# Altium PCB PCB.PcbDoc
Units mm, origin at the board's own origin, x right, y up, seen from the top; angles counter-clockwise.
Board outline 88.52 x 90.58 mm, 2 copper layers (Top Layer, Bottom Layer); 142 components, 58 nets, 379 pads, 215 vias.
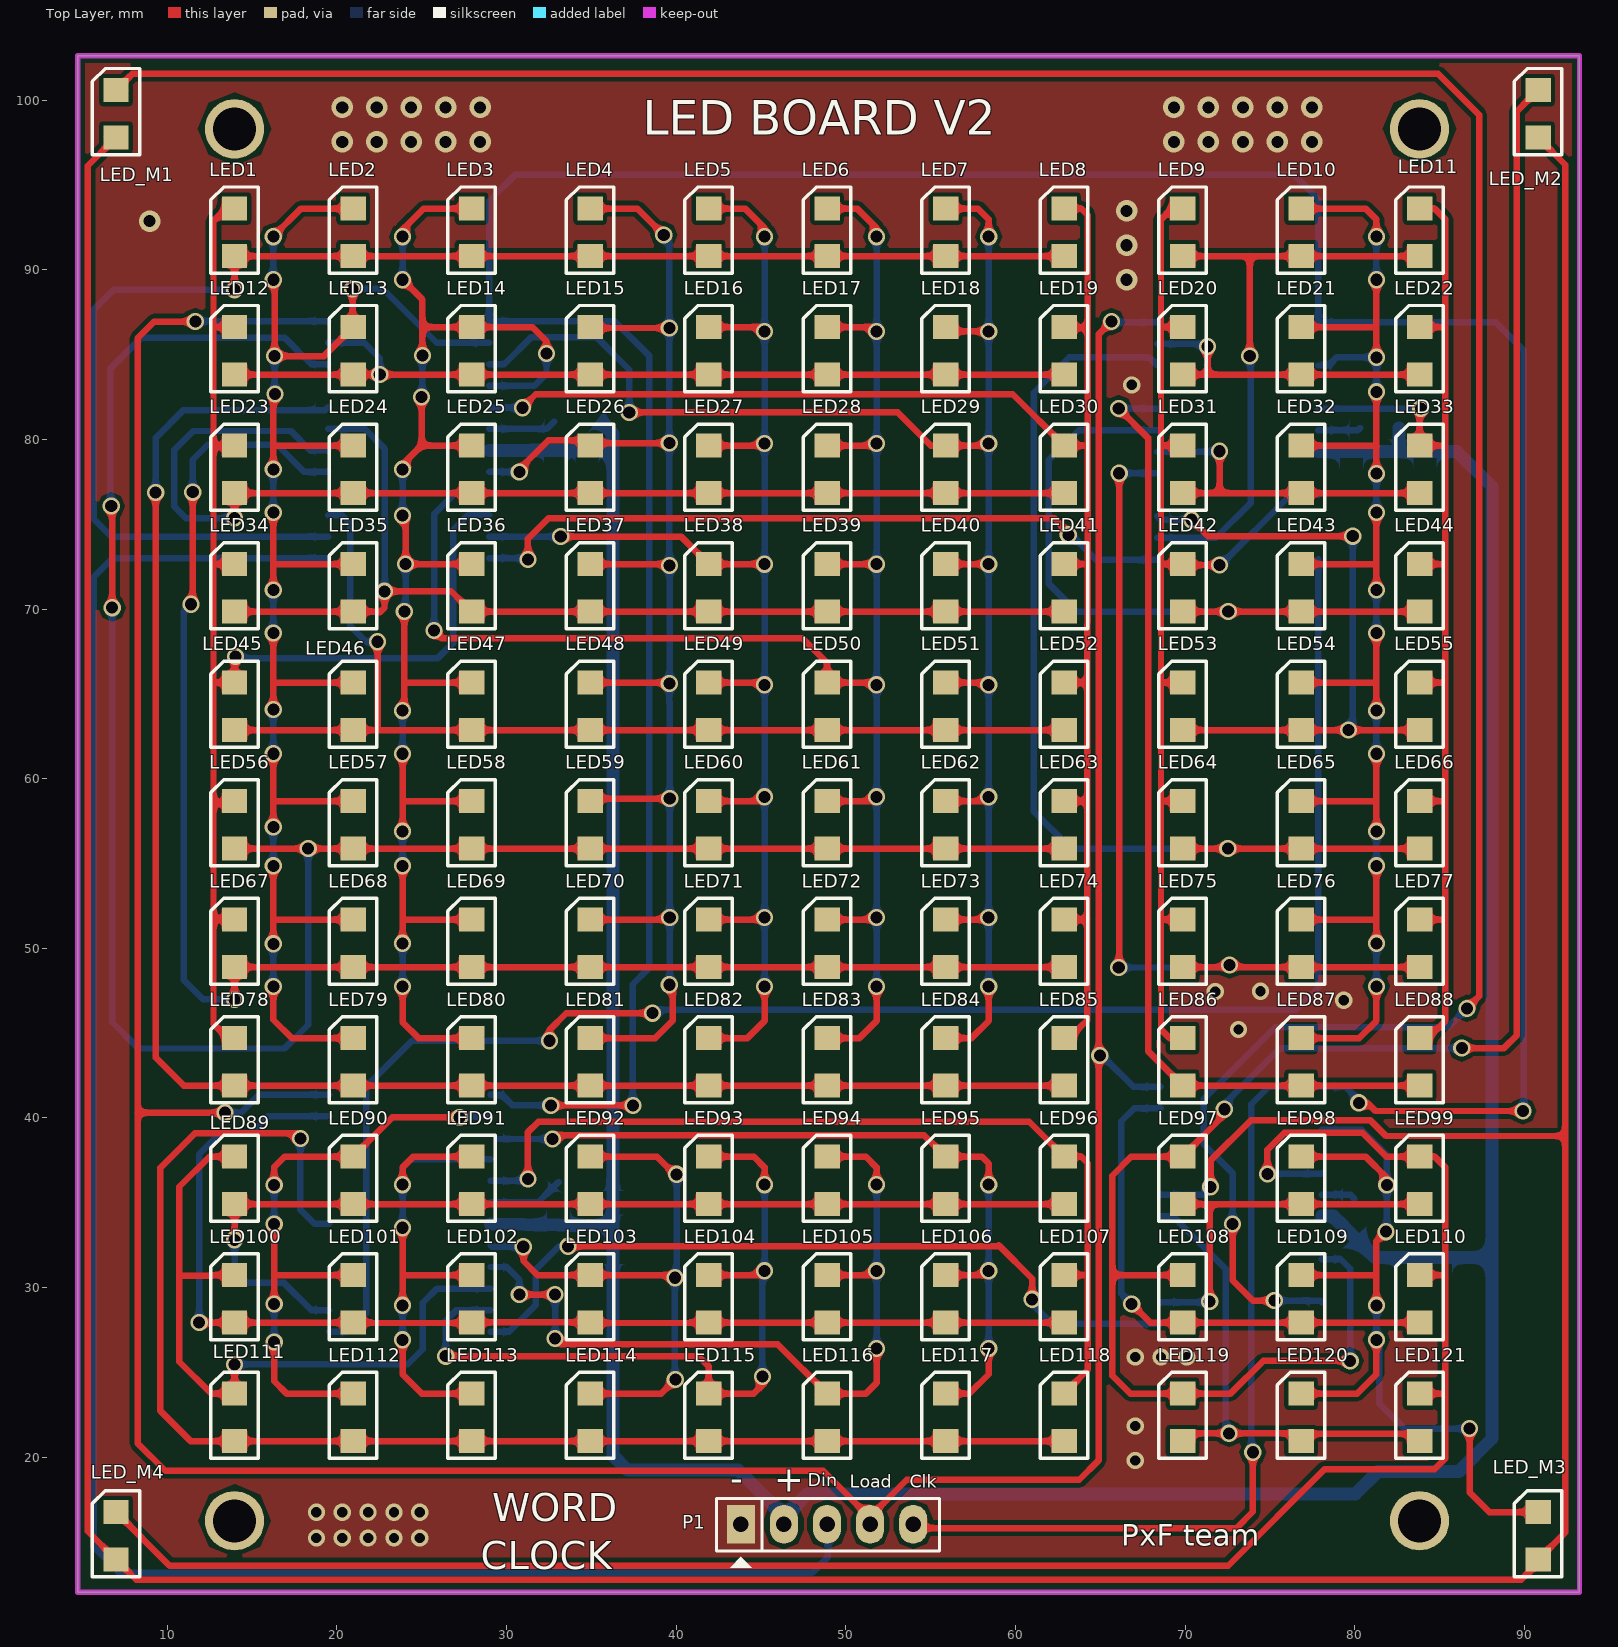
[diagram p0: Top Layer view]
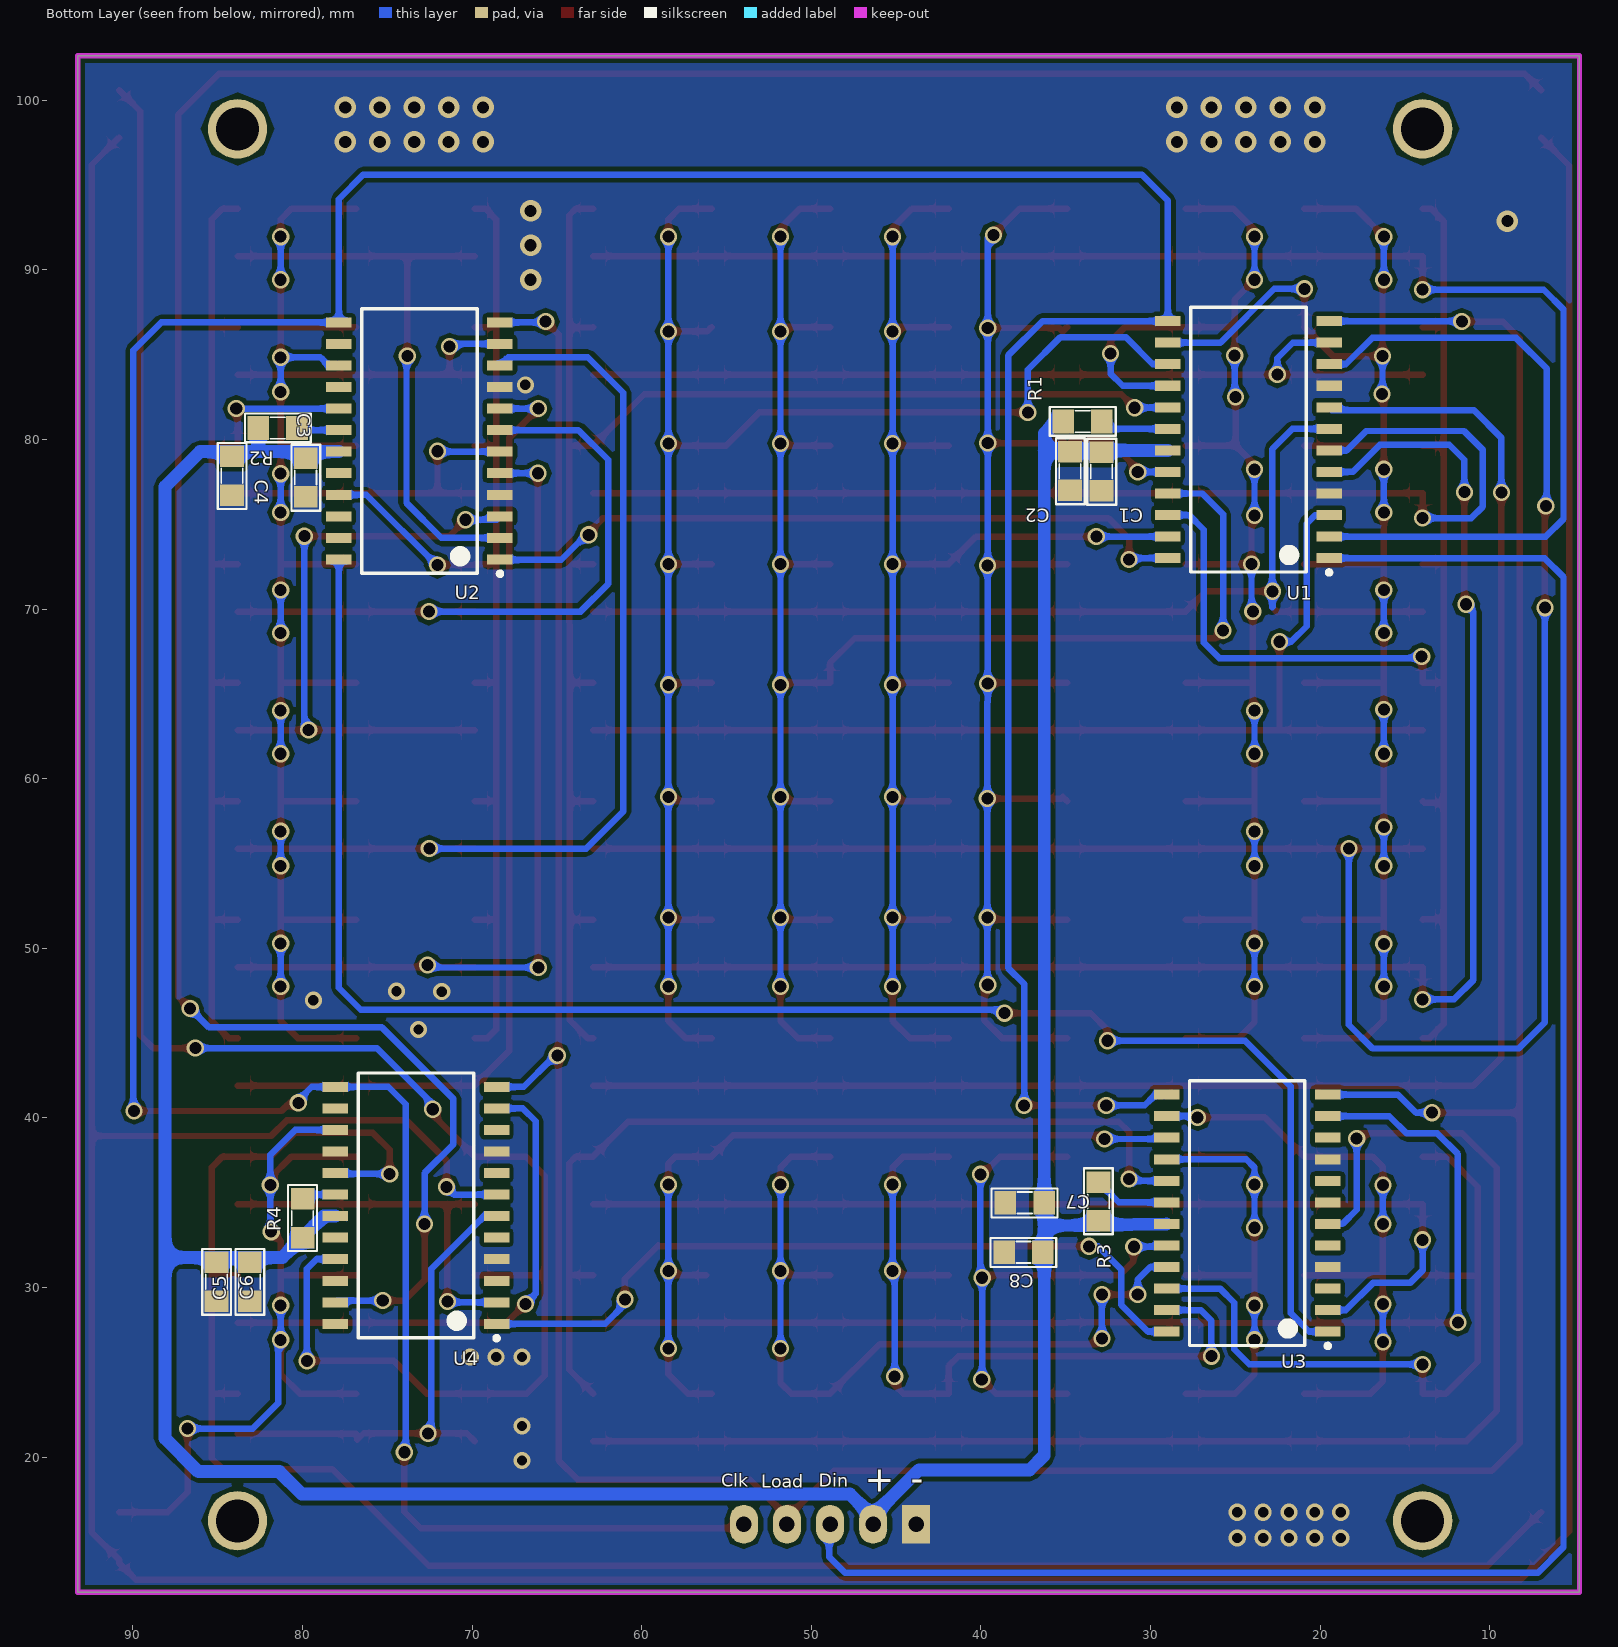
[diagram p1: Bottom Layer view, seen from below]
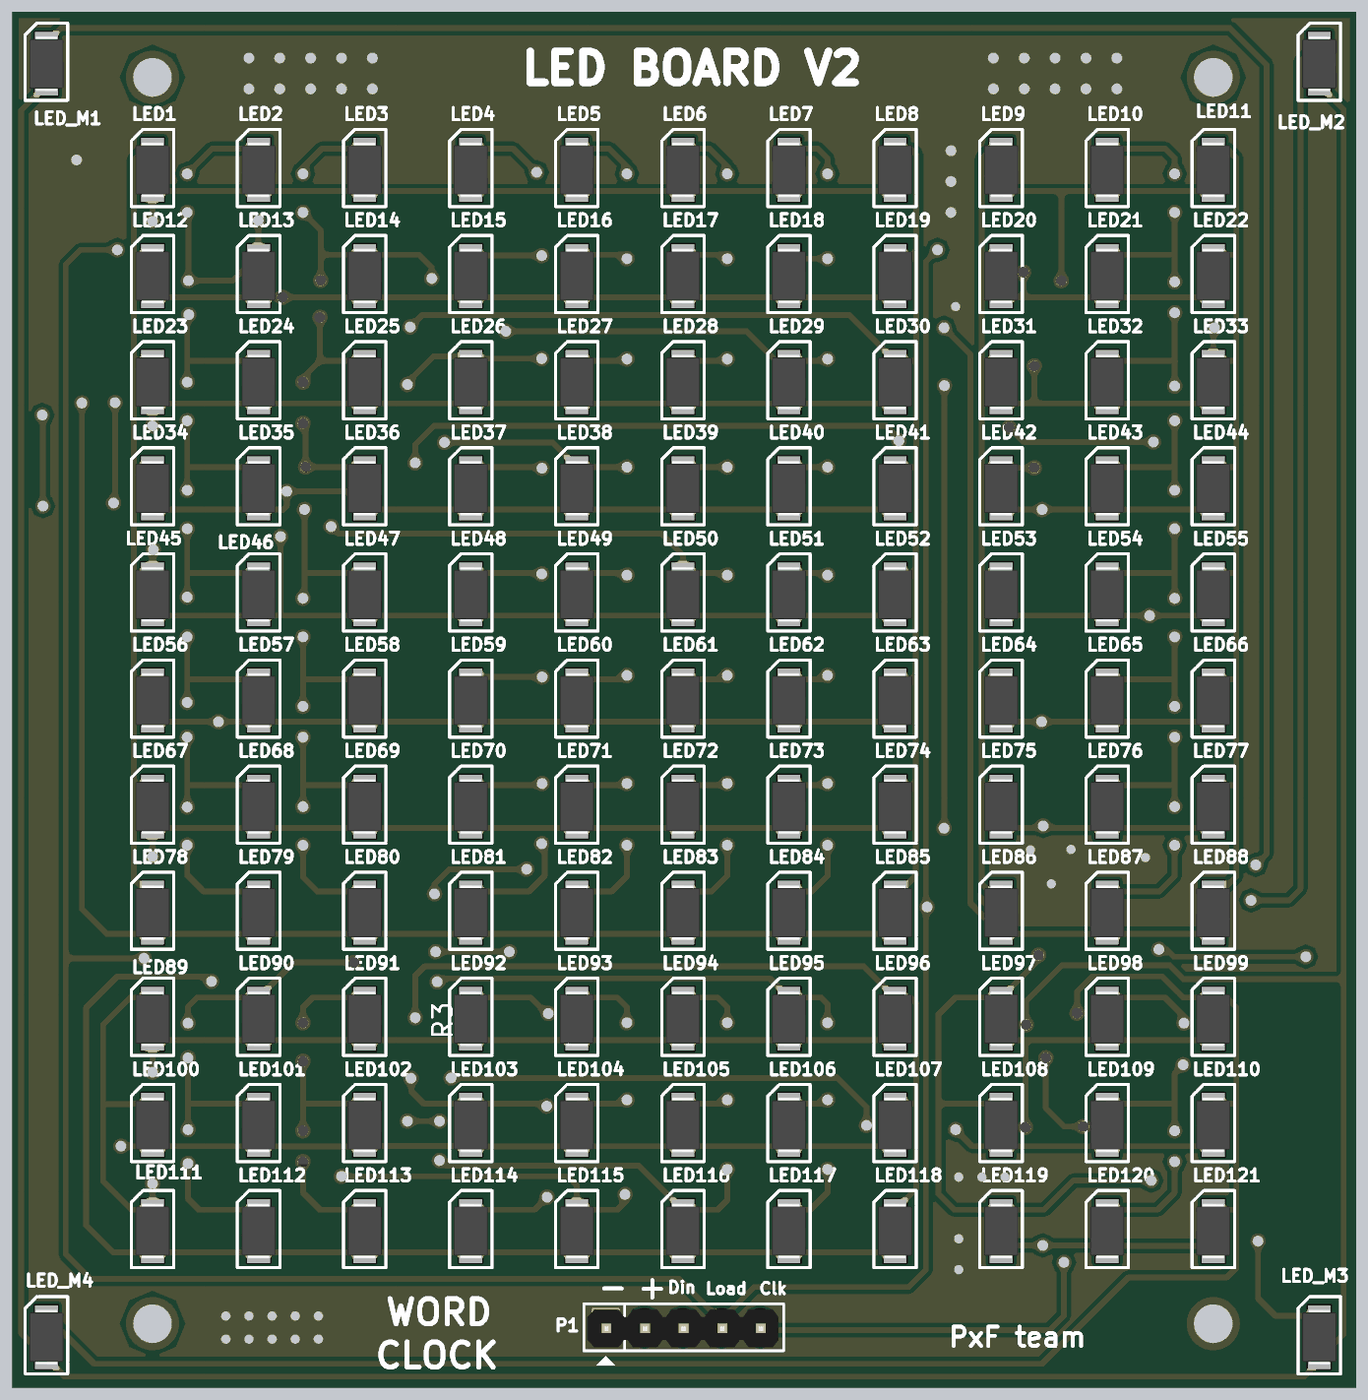
[diagram p2: 3D render of the assembled board from above, using the file's embedded part models]
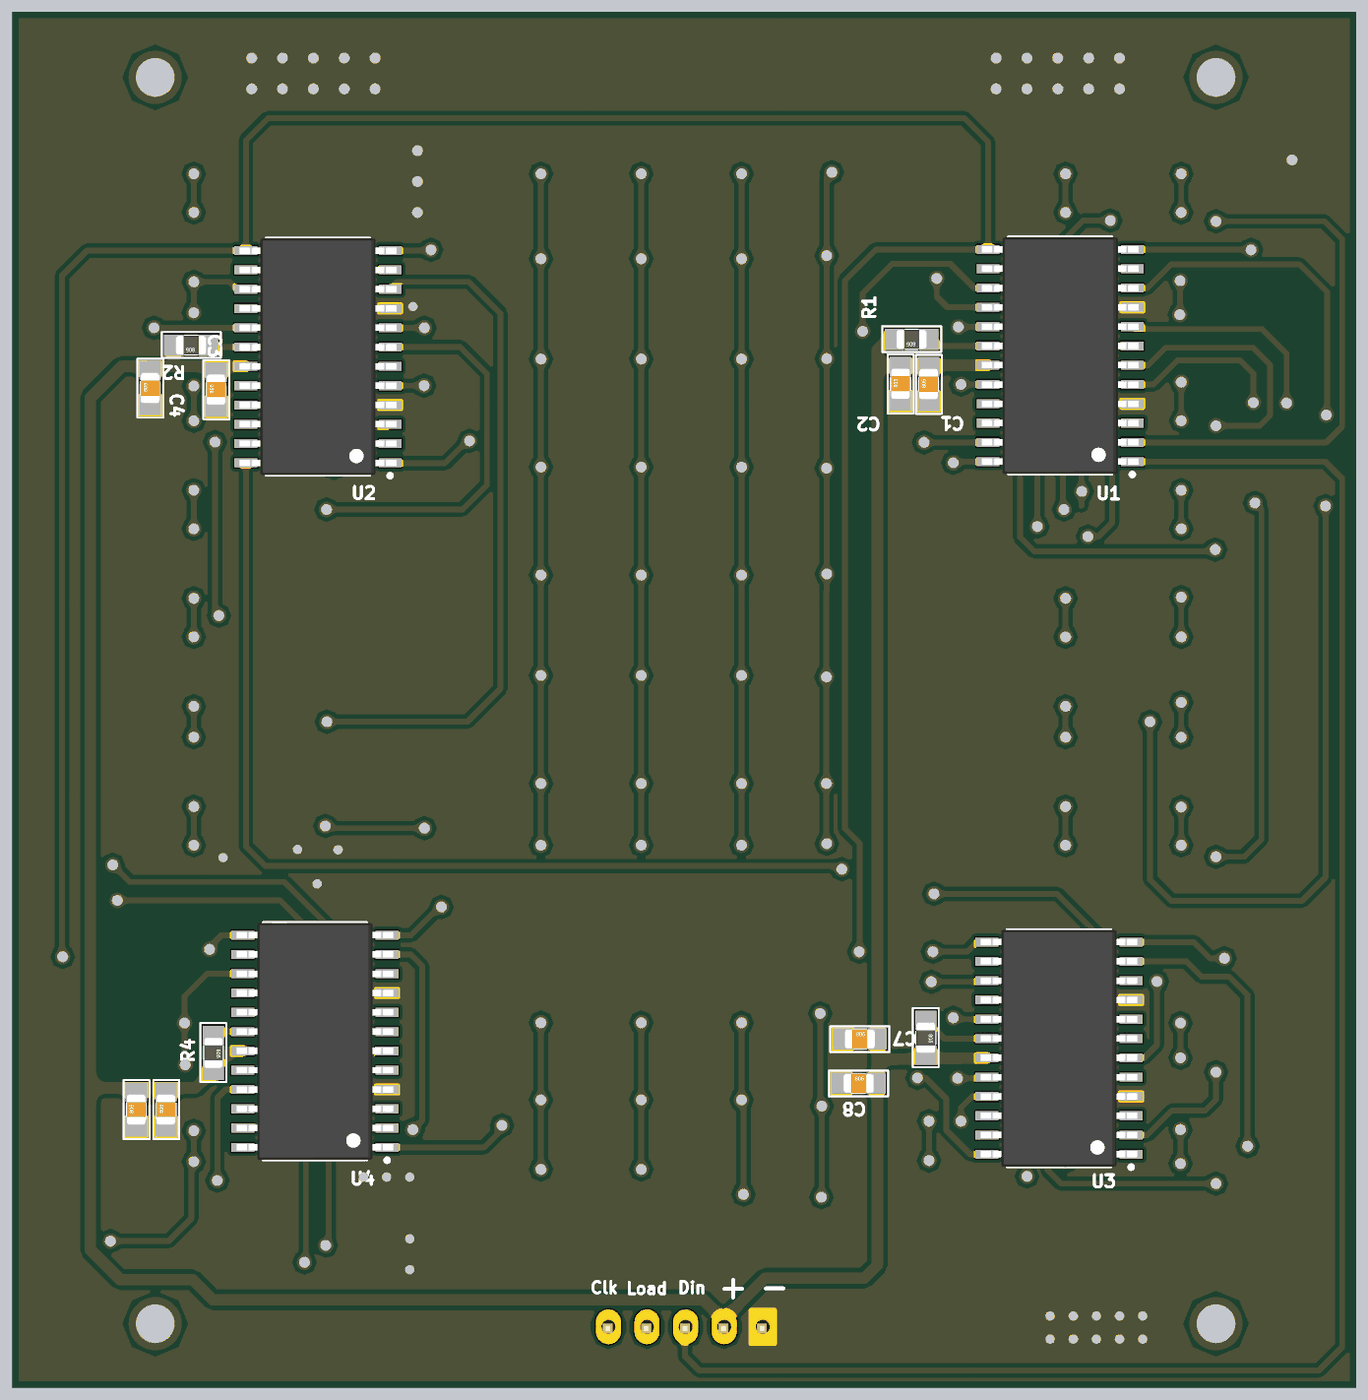
[diagram p3: 3D render of the assembled board from below, using the file's embedded part models]

## Layer stack, top to bottom
Top Solder: solder mask 0.0102, Solder Resist, Dk 3.5
Top Layer: signal copper 0.0356
Dielectric 1: dielectric 0.32, FR-4, Dk 4.8
Bottom Layer: signal copper 0.0356
Bottom Solder: solder mask 0.0102, Solder Resist, Dk 3.5

## Board outline
4.724,12.04 4.724,102.616 93.243,102.616 93.243,12.04

## Design rules (kind name [scope] priority, off if disabled: settings)
Clearance [All] p1: gap=0.254 ignorepadtopadclearanceinfootprint=FALSE
PlaneConnect [All] p1: planeconnectstyle=Relief reliefexpansion=0.508 reliefentries=4 reliefconductorwidth=0.381 reliefairgap=0.203
PolygonConnect [All] p1: connectstyle=Direct reliefconductorwidth=0.305 reliefentries=4 polygonreliefangle="90 Angle" airgapwidth=0.203
RoutingVias [All] p1: holewidth=1.27 width=2.54 viastyle="Through Hole" minholewidth=0.61 minwidth=1.016 maxholewidth=0.711 maxwidth=1.016
SolderMaskExpansion [All] p1: expansion=0.102
Width [All] p1: maxlimit=1.27 minlimit=0.203 preferedwidth=0.305 minimp=50.000000 maximp=50.000000 favimp=50.000000
29 further rules are at their usual default settings.

## Components (designator, comment, footprint, x,y, rotation, side; value= is the part's Value field where it differs from the comment)
C1 "Cap Non-Pol SMD" CAP-SM-0805 32.893,76.962 r90 bottom value=100pF
C2 "Cap Non-Pol SMD" CAP-SM-0805 34.747,76.987 r90 bottom value=100pF
C3 "Cap Non-Pol SMD" CAP-SM-0805 79.807,76.606 r90 bottom value=100pF
C4 "Cap Non-Pol SMD" CAP-SM-0805 84.15,76.708 r90 bottom value=100pF
C5 "Cap Non-Pol SMD" CAP-SM-0805 83.109,29.21 r90 bottom value=100pF
C6 "Cap Non-Pol SMD" CAP-SM-0805 85.065,29.21 r90 bottom value=100pF
C7 "Cap Non-Pol SMD" CAP-SM-0805 38.557,35.001 r180 bottom value=100pF
C8 "Cap Non-Pol SMD" CAP-SM-0805 38.633,32.08 r180 bottom value=100pF
LED1 "KA-3528EC" DIOM3020X13N 13.97,92.205 r90 top
LED2 "KA-3528EC" DIOM3020X13N 20.955,92.205 r90 top
LED3 "KA-3528EC" DIOM3020X13N 27.94,92.205 r90 top
LED4 "KA-3528EC" DIOM3020X13N 34.925,92.205 r90 top
LED5 "KA-3528EC" DIOM3020X13N 41.91,92.205 r90 top
LED6 "KA-3528EC" DIOM3020X13N 48.895,92.205 r90 top
LED7 "KA-3528EC" DIOM3020X13N 55.88,92.205 r90 top
LED8 "KA-3528EC" DIOM3020X13N 62.865,92.205 r90 top
LED9 "KA-3528EC" DIOM3020X13N 69.85,92.205 r90 top
LED10 "KA-3528EC" DIOM3020X13N 76.835,92.205 r90 top
LED11 "KA-3528EC" DIOM3020X13N 83.82,92.205 r90 top
LED12 "KA-3528EC" DIOM3020X13N 13.97,85.22 r90 top
LED13 "KA-3528EC" DIOM3020X13N 20.955,85.22 r90 top
LED14 "KA-3528EC" DIOM3020X13N 27.94,85.22 r90 top
LED15 "KA-3528EC" DIOM3020X13N 34.925,85.22 r90 top
LED16 "KA-3528EC" DIOM3020X13N 41.91,85.22 r90 top
LED17 "KA-3528EC" DIOM3020X13N 48.895,85.22 r90 top
LED18 "KA-3528EC" DIOM3020X13N 55.88,85.22 r90 top
LED19 "KA-3528EC" DIOM3020X13N 62.865,85.22 r90 top
LED20 "KA-3528EC" DIOM3020X13N 69.85,85.22 r90 top
LED21 "KA-3528EC" DIOM3020X13N 76.835,85.22 r90 top
LED22 "KA-3528EC" DIOM3020X13N 83.82,85.22 r90 top
LED23 "KA-3528EC" DIOM3020X13N 13.97,78.235 r90 top
LED24 "KA-3528EC" DIOM3020X13N 20.955,78.235 r90 top
LED25 "KA-3528EC" DIOM3020X13N 27.94,78.235 r90 top
LED26 "KA-3528EC" DIOM3020X13N 34.925,78.235 r90 top
LED27 "KA-3528EC" DIOM3020X13N 41.91,78.235 r90 top
LED28 "KA-3528EC" DIOM3020X13N 48.895,78.235 r90 top
LED29 "KA-3528EC" DIOM3020X13N 55.88,78.235 r90 top
LED30 "KA-3528EC" DIOM3020X13N 62.865,78.235 r90 top
LED31 "KA-3528EC" DIOM3020X13N 69.85,78.235 r90 top
LED32 "KA-3528EC" DIOM3020X13N 76.835,78.235 r90 top
LED33 "KA-3528EC" DIOM3020X13N 83.82,78.235 r90 top
LED34 "KA-3528EC" DIOM3020X13N 13.97,71.25 r90 top
LED35 "KA-3528EC" DIOM3020X13N 20.955,71.25 r90 top
LED36 "KA-3528EC" DIOM3020X13N 27.94,71.25 r90 top
LED37 "KA-3528EC" DIOM3020X13N 34.925,71.25 r90 top
LED38 "KA-3528EC" DIOM3020X13N 41.91,71.25 r90 top
LED39 "KA-3528EC" DIOM3020X13N 48.895,71.25 r90 top
LED40 "KA-3528EC" DIOM3020X13N 55.88,71.25 r90 top
LED41 "KA-3528EC" DIOM3020X13N 62.865,71.25 r90 top
LED42 "KA-3528EC" DIOM3020X13N 69.85,71.25 r90 top
LED43 "KA-3528EC" DIOM3020X13N 76.835,71.25 r90 top
LED44 "KA-3528EC" DIOM3020X13N 83.82,71.25 r90 top
LED45 "KA-3528EC" DIOM3020X13N 13.97,64.265 r90 top
LED46 "KA-3528EC" DIOM3020X13N 20.955,64.265 r90 top
LED47 "KA-3528EC" DIOM3020X13N 27.94,64.265 r90 top
LED48 "KA-3528EC" DIOM3020X13N 34.925,64.265 r90 top
LED49 "KA-3528EC" DIOM3020X13N 41.91,64.265 r90 top
LED50 "KA-3528EC" DIOM3020X13N 48.895,64.265 r90 top
LED51 "KA-3528EC" DIOM3020X13N 55.88,64.265 r90 top
LED52 "KA-3528EC" DIOM3020X13N 62.865,64.265 r90 top
LED53 "KA-3528EC" DIOM3020X13N 69.85,64.265 r90 top
LED54 "KA-3528EC" DIOM3020X13N 76.835,64.265 r90 top
LED55 "KA-3528EC" DIOM3020X13N 83.82,64.265 r90 top
LED56 "KA-3528EC" DIOM3020X13N 13.97,57.28 r90 top
LED57 "KA-3528EC" DIOM3020X13N 20.955,57.28 r90 top
LED58 "KA-3528EC" DIOM3020X13N 27.94,57.28 r90 top
LED59 "KA-3528EC" DIOM3020X13N 34.925,57.28 r90 top
LED60 "KA-3528EC" DIOM3020X13N 41.91,57.28 r90 top
LED61 "KA-3528EC" DIOM3020X13N 48.895,57.28 r90 top
LED62 "KA-3528EC" DIOM3020X13N 55.88,57.28 r90 top
LED63 "KA-3528EC" DIOM3020X13N 62.865,57.28 r90 top
LED64 "KA-3528EC" DIOM3020X13N 69.85,57.28 r90 top
LED65 "KA-3528EC" DIOM3020X13N 76.835,57.28 r90 top
LED66 "KA-3528EC" DIOM3020X13N 83.82,57.28 r90 top
LED67 "KA-3528EC" DIOM3020X13N 13.97,50.295 r90 top
LED68 "KA-3528EC" DIOM3020X13N 20.955,50.295 r90 top
LED69 "KA-3528EC" DIOM3020X13N 27.94,50.295 r90 top
LED70 "KA-3528EC" DIOM3020X13N 34.925,50.295 r90 top
LED71 "KA-3528EC" DIOM3020X13N 41.91,50.295 r90 top
LED72 "KA-3528EC" DIOM3020X13N 48.895,50.295 r90 top
LED73 "KA-3528EC" DIOM3020X13N 55.88,50.295 r90 top
LED74 "KA-3528EC" DIOM3020X13N 62.865,50.295 r90 top
LED75 "KA-3528EC" DIOM3020X13N 69.85,50.295 r90 top
LED76 "KA-3528EC" DIOM3020X13N 76.835,50.295 r90 top
LED77 "KA-3528EC" DIOM3020X13N 83.82,50.295 r90 top
LED78 "KA-3528EC" DIOM3020X13N 13.97,43.31 r90 top
LED79 "KA-3528EC" DIOM3020X13N 20.955,43.31 r90 top
LED80 "KA-3528EC" DIOM3020X13N 27.94,43.31 r90 top
LED81 "KA-3528EC" DIOM3020X13N 34.925,43.31 r90 top
LED82 "KA-3528EC" DIOM3020X13N 41.91,43.31 r90 top
LED83 "KA-3528EC" DIOM3020X13N 48.895,43.31 r90 top
LED84 "KA-3528EC" DIOM3020X13N 55.88,43.31 r90 top
LED85 "KA-3528EC" DIOM3020X13N 62.865,43.31 r90 top
LED86 "KA-3528EC" DIOM3020X13N 69.85,43.31 r90 top
LED87 "KA-3528EC" DIOM3020X13N 76.835,43.31 r90 top
LED88 "KA-3528EC" DIOM3020X13N 83.82,43.31 r90 top
LED89 "KA-3528EC" DIOM3020X13N 13.97,36.325 r90 top
LED90 "KA-3528EC" DIOM3020X13N 20.955,36.325 r90 top
LED91 "KA-3528EC" DIOM3020X13N 27.94,36.325 r90 top
LED92 "KA-3528EC" DIOM3020X13N 34.925,36.325 r90 top
LED93 "KA-3528EC" DIOM3020X13N 41.91,36.325 r90 top
LED94 "KA-3528EC" DIOM3020X13N 48.895,36.325 r90 top
LED95 "KA-3528EC" DIOM3020X13N 55.88,36.325 r90 top
LED96 "KA-3528EC" DIOM3020X13N 62.865,36.325 r90 top
LED97 "KA-3528EC" DIOM3020X13N 69.85,36.325 r90 top
LED98 "KA-3528EC" DIOM3020X13N 76.835,36.325 r90 top
LED99 "KA-3528EC" DIOM3020X13N 83.82,36.325 r90 top
LED100 "KA-3528EC" DIOM3020X13N 13.97,29.34 r90 top
LED101 "KA-3528EC" DIOM3020X13N 20.955,29.34 r90 top
LED102 "KA-3528EC" DIOM3020X13N 27.94,29.34 r90 top
LED103 "KA-3528EC" DIOM3020X13N 34.925,29.34 r90 top
LED104 "KA-3528EC" DIOM3020X13N 41.91,29.34 r90 top
LED105 "KA-3528EC" DIOM3020X13N 48.895,29.34 r90 top
LED106 "KA-3528EC" DIOM3020X13N 55.88,29.34 r90 top
LED107 "KA-3528EC" DIOM3020X13N 62.865,29.34 r90 top
LED108 "KA-3528EC" DIOM3020X13N 69.85,29.34 r90 top
LED109 "KA-3528EC" DIOM3020X13N 76.835,29.34 r90 top
LED110 "KA-3528EC" DIOM3020X13N 83.82,29.34 r90 top
LED111 "KA-3528EC" DIOM3020X13N 13.97,22.355 r90 top
LED112 "KA-3528EC" DIOM3020X13N 20.955,22.355 r90 top
LED113 "KA-3528EC" DIOM3020X13N 27.94,22.355 r90 top
LED114 "KA-3528EC" DIOM3020X13N 34.925,22.355 r90 top
LED115 "KA-3528EC" DIOM3020X13N 41.91,22.355 r90 top
LED116 "KA-3528EC" DIOM3020X13N 48.895,22.355 r90 top
LED117 "KA-3528EC" DIOM3020X13N 55.88,22.355 r90 top
LED118 "KA-3528EC" DIOM3020X13N 62.865,22.355 r90 top
LED119 "KA-3528EC" DIOM3020X13N 69.85,22.355 r90 top
LED120 "KA-3528EC" DIOM3020X13N 76.835,22.355 r90 top
LED121 "KA-3528EC" DIOM3020X13N 83.82,22.355 r90 top
LED_M1 "KA-3528EC" DIOM3020X13N 6.985,99.19 r90 top
LED_M2 "KA-3528EC" DIOM3020X13N 90.805,99.19 r90 top
LED_M3 "KA-3528EC" DIOM3020X13N 90.805,15.37 r90 top
LED_M4 "KA-3528EC" DIOM3020X13N 6.985,15.37 r90 top
P1 "Header 5" JP5 43.815,16.053 r0 top
R1 "RESISTOR SMD" RES-SM-0805 32.868,81.051 r0 bottom value=10K
R2 "RESISTOR SMD" RES-SM-0805 80.315,80.67 r0 bottom value=10K
R3 "RESISTOR SMD" RES-SM-0805 33.071,36.22 r270 bottom value=10K
R4 "RESISTOR SMD" RES-SM-0805 79.985,35.23 r270 bottom value=10K
U1 "MAX7219CWG" SOIC127P1030X265-24N 24.232,79.985 r0 bottom
U2 "MAX7219CWG" SOIC127P1030X265-24N 73.101,79.908 r0 bottom
U3 "MAX7219CWG" SOIC127P1030X265-24N 24.308,34.392 r0 bottom
U4 "MAX7219CWG" SOIC127P1030X265-24N 73.304,34.849 r0 bottom

## Footprints (in the part's own frame and the unit in brackets; to place one, negate y for a bottom-side part, rotate by r counter-clockwise, add the part's x,y. Pads: shape width x height; smd on the part's side, far side on the other; paste and mask are expansions set on the pad)
CAP-SM-0805 [mil]
  rect 50x55 smd: 1(0,0) 2(90,0)
  silkscreen extent -32,-34 121,33, body extent 6,-25 84,25, height 31
DIOM3020X13N [mm] "Molded Diode, 2-Leads, Body 3.00x2.00mm, IPC Medium Density"
  rect 1.4x1.5 smd: 1(-1.4,0) 2(1.4,0)
  silkscreen extent -2.41,-1.4 2.67,1.4, body extent -1.85,-1.12 1.85,1.12, height 1.3
JP5 [mil] "JP5"
  rect 65x90 hole 36: 1(0,0)
  oval 65x90 hole 36: 2(100,0) 3(200,0) 4(300,0) 5(400,0)
  silkscreen extent -57,-101 461,60, body extent -48,-53 448,45, height 323
RES-SM-0805 [mil]
  rect 50x55 smd: 1(0,0) 2(90,0)
  silkscreen extent -32,-34 121,33, body extent 6,-25 84,25, height 31
SOIC127P1030X265-24N [mm] "SOIC, 24-Leads, Body 15.40x7.50mm, Pitch 1.27mm, IPC Medium Density"
  rect 1.5x0.59 smd: 1(-4.75,6.985) 2(-4.75,5.715) 3(-4.75,4.445) 4(-4.75,3.175) 5(-4.75,1.905) 6(-4.75,0.635) 7(-4.75,-0.635) 8(-4.75,-1.905) 9(-4.75,-3.175) 10(-4.75,-4.445) 11(-4.75,-5.715) 12(-4.75,-6.985) 13(4.75,-6.985) 14(4.75,-5.715) 15(4.75,-4.445) 16(4.75,-3.175) 17(4.75,-1.905) 18(4.75,-0.635) 19(4.75,0.635) 20(4.75,1.905) 21(4.75,3.175) 22(4.75,4.445) 23(4.75,5.715) 24(4.75,6.985)
  silkscreen extent -4.87,-7.8 3.4,7.95, body extent -5.16,-7.8 5.16,7.8, height 2.65

## Part data
C1 C2 C3 C4 C5 C6 C7 C8: "Capacitor"
LED1 LED2 LED3 LED4 LED5 LED6 LED7 LED8 LED9 LED10 LED11 LED12 LED13 LED14 LED15 LED16 LED17 LED18 LED19 LED20 LED21 LED22 LED23 LED24 LED25 LED26 LED27 LED28 LED29 LED30 LED31 LED32 LED33 LED34 LED35 LED36 LED37 LED38 LED39 LED40 LED41 LED42 LED43 LED44 LED45 LED46 LED47 LED48 LED49 LED50 LED51 LED52 LED53 LED54 LED55 LED56 LED57 LED58 LED59 LED60 LED61 LED62 LED63 LED64 LED65 LED66 LED67 LED68 LED69 LED70 LED71 LED72 LED73 LED74 LED75 LED76 LED77 LED78 LED79 LED80 LED81 LED82 LED83 LED84 LED85 LED86 LED87 LED88 LED89 LED90 LED91 LED92 LED93 LED94 LED95 LED96 LED97 LED98 LED99 LED100 LED101 LED102 LED103 LED104 LED105 LED106 LED107 LED108 LED109 LED110 LED111 LED112 LED113 LED114 LED115 LED116 LED117 LED118 LED119 LED120 LED121 LED_M1 LED_M2 LED_M3 LED_M4: library part LED_3528, "KINGBRIGHT         KA-3528EC             LED, Red, SMD, 2.4mm, 20 mA, 2 V, 627 nm", Color=Red, Manufacturer=Kingbright, Package=2SMD, Supplier Part Number 1=8530211, Category=LEDs, ComponentLink1Description=https://datasheet.ciiva.com/5785/1500240-5785780.pdf, ComponentLink1URL=https://datasheet.ciiva.com/5785/1500240-5785780.pdf, ComponentLink2Description=https://datasheet.ciiva.com/14176/bd254568-254571-14176482.pdf, ComponentLink2URL=https://datasheet.ciiva.com/14176/bd254568-254571-14176482.pdf, ComponentLink3Description=https://datasheet.ciiva.com/8060/1500240-8060332.pdf, ComponentLink3URL=https://datasheet.ciiva.com/8060/1500240-8060332.pdf, ComponentLink4Description=https://datasheet.ciiva.com/8060/1500240-8060331.pdf, ComponentLink4URL=https://datasheet.ciiva.com/8060/1500240-8060331.pdf, ComponentLink5Description=https://datasheet.ciiva.com/20166/72-8261-20166551.pdf, ComponentLink5URL=https://datasheet.ciiva.com/20166/72-8261-20166551.pdf, Intensity="40(Max) mcd", Lens Appearance="Colorless Non Diffused", Lens Shape Type=Circular, Manufacturer Part Number=KA-3528EC, Mounting="Surface Mount", Mounting Orientation="Top Mount", Number of LEDs=1, Peak Wavelength="625 nm", Pin Count=2, Pricing 1="5=0.372, 25=0.282, 100=0.232, 250=0.175, 500=0.15, 1000=0.134 (EUR)", Rad Hard=No, Stock 1=2196, Supplier 1=Farnell, Type=Uni-Color, Viewing Angle="120 °"
P1: "Header, 5-Pin", LatestRevisionDate=17-Jul-2002, LatestRevisionNote="Re-released for DXP Platform.", Publisher="Altium Limited"
R1 R2 R3 R4: "Resistor"
U1 U2 U3 U4: "IC DRIVER LED DISP 8DGT 24-SOIC", High Level Output Current="- 2 mA", Low Level Output Current="5 mA", Manufacturer=Maxim, Maximum Operating Temperature="+ 70 C", Minimum Operating Temperature="0 C", Operating Supply Voltage="4 V to 5.5 V", Package / Case=SOIC-Wide-24, Pd - Power Dissipation="941 mW", Supplier Part Number 1=MAX7219CWG-ND, Supply Current - Max="330 mA", &lt;PCN&gt;="http://www.mouser.com/PCN/Maxim IC_M000753.pdf", Brand="Maxim Integrated", ComponentLink1Description=https://datasheet.ciiva.com/26876/max7219cwg-26876054.pdf, ComponentLink1URL=https://datasheet.ciiva.com/26876/max7219cwg-26876054.pdf, ComponentLink2Description=https://datasheet.ciiva.com/3166/max7219-max7221-3166235.pdf, ComponentLink2URL=https://datasheet.ciiva.com/3166/max7219-max7221-3166235.pdf, ComponentLink3Description=https://datasheet.ciiva.com/1941/max7219-max7221-1941392.pdf, ComponentLink3URL=https://datasheet.ciiva.com/1941/max7219-max7221-1941392.pdf, ComponentLink4Description=https://datasheet.ciiva.com/17405/max7219-max7221-17405253.pdf, ComponentLink4URL=https://datasheet.ciiva.com/17405/max7219-max7221-17405253.pdf, Factory Pack Quantity=30, Height="2.35 mm", Length="15.6 mm", Manufacturer Part Number=MAX7219CWG, Mounting Style=SMD/SMT, Number of Digits=8, Number of Segments=64, Packaging=Tube, Part # Aliases=MAX7219, Product="LED Display Drivers", Product Category="LED Display Drivers", Series=MAX7219, Stock 1=0, Supplier 1=Digi-Key, Unit Weight="0.025909 oz", Width="7.6 mm"

## Free pads (board coordinates)
  round 3.5 hole 2.54: 3(13.97,16.256) 3(13.97,98.298) 3(83.82,16.256) 3(83.82,98.298)

## Via types
v1: diameter 1.016, hole 0.711, Top Layer to Bottom Layer, tented both sides, 171 vias
v2: diameter 1.27, hole 0.711, Top Layer to Bottom Layer, tented both sides, 24 vias
v3: diameter 1.016, hole 0.61, Top Layer to Bottom Layer, tented both sides, 20 vias

## Nets (pads, with @x,y where several pads share a name; then routed paths per layer and width w, separated by ;. In a path a pad name is that pad's centre, name@x,y a point inside that pad or via, vN(x,y) a via of type N, cw(c..) or ccw(c..) an arc to the next point about the centre after c; other vN are vias at no path point)
CLK: P1.5 U1.13 U2.13 U3.13 U4.13 | length 247.8
  Top Layer w0.381: v1(32.614,40.742) v1(37.465,40.742) ; P1.5@54.026,15.164 54.686,15.824 73.025,15.824 73.99,16.789 v1(73.99,20.295) ; v1(80.239,40.894) 80.747,40.894 81.229,40.411 v1(89.916,40.411)
  Bottom Layer w0.381: U3.13 29.718,41.377 30.353,40.742 v1(32.614,40.742) ; v1(37.465,40.742) 37.44,40.894 37.44,47.88 38.405,48.845 38.405,84.938 36.373,86.97 U1.13 28.982,94.056 30.531,95.606 76.403,95.606 77.851,94.157 U2.13 88.316,86.893 89.967,85.242 89.967,40.462 v1(89.916,40.411) ; v1@74.206,20.079 v1(73.99,20.295) 73.901,20.383 73.901,40.805 74.93,41.834 U4.13 79.451,41.834 80.239,41.046 v1(80.239,40.894)
DIN_U1: P1.3 U1.1 | length 116.8
  Bottom Layer w0.381: U1.1 6.782,73 5.664,71.882 5.664,14.707 7.188,13.183 48.006,13.183 48.946,14.122 P1.3@48.946,15.164
DOUT_U1: U1.24 U2.1 | length 42.6
  Top Layer w0.381: v1(31.267,72.923) 31.267,74.143 32.487,75.362 62.281,75.362 63.246,74.397 63.221,74.371 v1(63.119,74.371)
  Bottom Layer w0.381: U1.24 31.344,73 v1(31.267,72.923) ; v1(63.119,74.371) 63.271,74.371 64.745,72.898 U2.1@68.351,72.898
DOUT_U2: U2.24 U3.1 | length 100.1
  Top Layer w0.381: v1(32.537,44.552) 32.537,45.187 33.528,46.177 v1(38.608,46.177)
  Bottom Layer w0.381: U3.1 20.65,27.407 21.742,28.499 21.742,41.859 24.435,44.552 v1(32.537,44.552) ; v1(38.608,46.177) 38.811,46.38 76.556,46.38 77.851,47.676 U2.24
DOUT_U3: U3.24 U4.1 | length 45.6
  Top Layer w0.381: v1(33.63,32.436) 58.979,32.436 59.03,32.487 60.985,30.531 v1(60.985,29.312)
  Bottom Layer w0.381: U3.24 30.15,27.407 31.725,28.981 31.725,31.064 33.096,32.436 v1(33.63,32.436) ; v1(60.985,29.312) 60.985,29.032 62.154,27.864 U4.1
GND: C1.1 C2.1 C3.1 C4.1 C5.1 C6.1 C7.1 C8.1 P1.1 U1.4 U1.9 U2.4 U2.9 U3.4 U3.9 U4.4 U4.9
  other v2: 66.548,89.408 66.548,91.44 8.966,92.862 66.548,93.472 20.32,97.536 22.352,97.536 24.384,97.536 26.416,97.536 28.448,97.536 69.342,97.536 71.374,97.536 73.406,97.536 75.438,97.536 77.47,97.536 20.32,99.568 22.352,99.568 24.384,99.568 26.416,99.568 28.448,99.568 69.342,99.568 71.374,99.568 73.406,99.568 75.438,99.568 77.47,99.568
  other v3: 18.796,15.24 20.32,15.24 21.844,15.24 23.368,15.24 24.892,15.24 18.796,16.764 20.32,16.764 21.844,16.764 23.368,16.764 24.892,16.764 67.056,19.812 67.056,21.844 67.056,25.908 68.58,25.908 70.104,25.908 73.152,45.212 79.35,46.939 71.78,47.447 74.447,47.473 66.853,83.21
LED0_U1: LED1.1 LED2.1 LED3.1 LED4.1 LED5.1 LED6.1 LED7.1 LED8.1 U1.2 | length 86.3
  Top Layer w0.381: v1(13.97,88.824) LED1.1 LED2.1 LED3.1 LED4.1 LED5.1 LED6.1 LED7.1 LED8.1
  Bottom Layer w0.381: v1(13.97,88.824) 6.833,88.824 5.664,87.655 5.664,75.311 6.706,74.27 U1.2
LED0_U2: LED9.1 LED10.1 LED11.1 U2.2 | length 34.9
  Top Layer w0.381: LED9.1 73.812,90.805 ; v1(73.812,84.912) 73.812,90.805 ; LED11.1 LED10.1 73.812,90.805
  Bottom Layer w0.381: U2.2 71.806,74.193 73.862,76.249 73.862,84.863 v1(73.812,84.912)
LED0_U3: LED89.1 LED90.1 LED91.1 LED92.1 LED93.1 LED94.1 LED95.1 LED96.1 U3.2 | length 59.4
  Top Layer w0.381: v1(13.97,32.817) LED89.1 LED90.1 LED91.1 LED92.1 LED93.1 LED94.1 LED95.1 LED96.1
  Bottom Layer w0.381: v1(13.97,32.817) 13.97,31.013 14.707,30.277 16.891,30.277 18.491,28.677 U3.2
LED0_U4: LED97.1 LED98.1 LED99.1 U4.2 | length 22.6
  Top Layer w0.381: LED97.1 71.45,34.925 ; v1(71.45,29.185) 71.45,34.925 ; LED99.1 LED98.1 71.45,34.925
  Bottom Layer w0.381: U4.2 71.399,29.134 v1(71.45,29.185)
LED1_U1: LED12.1 LED13.1 LED14.1 LED15.1 LED16.1 LED17.1 LED18.1 LED19.1 U1.11 | length 53.3
  Top Layer w0.381: LED12.1 LED13.1 v1(22.53,83.82) LED14.1 LED15.1 LED16.1 LED17.1 LED18.1 LED19.1
  Bottom Layer w0.381: U1.11 21.615,85.7 22.53,84.785 v1(22.53,83.82)
LED1_U2: LED20.1 LED21.1 LED22.1 U2.11 | length 18.7
  Top Layer w0.381: LED20.1 71.323,83.82 ; v1(71.323,85.471) 71.323,83.82 ; LED22.1 LED21.1 71.323,83.82
  Bottom Layer w0.381: U2.11 71.171,85.623 v1(71.323,85.471)
LED1_U3: LED100.1 LED101.1 LED102.1 LED103.1 LED104.1 LED105.1 LED106.1 LED107.1 U3.11 | length 69.5
  Top Layer w0.381: v1@11.9,27.94 LED100.1 LED101.1 27.94,27.915 LED102.1@27.965,27.915 ; LED102.1 27.953,27.953 34.912,27.953 LED103.1 ; LED103.1@34.95,27.915 LED104.1 LED105.1 LED106.1 LED107.1
  Bottom Layer w0.381: v1(11.887,27.94) 11.887,37.871 13.106,39.091 14.91,39.091 15.926,40.107 U3.11
LED1_U4: LED108.1 LED109.1 LED110.1 U4.11 | length 31.3
  Top Layer w0.381: v1@66.853,29.286 v1(66.853,29.032) 67.945,27.94 LED108.1 LED109.1 LED110.1
  Bottom Layer w0.381: v1(66.853,29.032) 66.243,29.642 66.243,39.802 67.005,40.564 U4.11
LED2_U1: LED23.1 LED24.1 LED25.1 LED26.1 LED27.1 LED28.1 LED29.1 LED30.1 U1.6 | length 67.5
  Top Layer w0.381: v1(13.97,75.362) LED23.1 LED24.1 LED25.1 LED26.1 LED27.1 LED28.1 LED29.1 LED30.1
  Bottom Layer w0.381: v1(13.97,75.362) 11.1,75.362 10.414,76.048 10.414,79.375 11.532,80.493 17.297,80.493 18.44,79.35 U1.6
LED2_U2: LED31.1 LED32.1 LED33.1 U2.6 | length 20.1
  Top Layer w0.381: LED31.1 72.034,76.835 ; v1(72.034,79.299) 72.034,76.835 ; LED33.1 LED32.1 72.034,76.835
  Bottom Layer w0.381: U2.6 72.009,79.273 v1(72.034,79.299)
LED2_U3: LED111.1 LED112.1 LED113.1 LED114.1 LED115.1 LED116.1 LED117.1 LED118.1 U3.6 | length 83.8
  Top Layer w0.381: v1(17.856,38.786) 17.551,39.091 11.633,39.091 9.601,37.059 9.601,22.733 11.379,20.955 LED111.1 LED112.1 LED113.1 LED114.1 LED115.1 LED116.1 LED117.1 LED118.1
  Bottom Layer w0.381: v1(17.856,38.786) 17.856,34.595 18.694,33.757 U3.6
LED2_U4: LED119.1 LED120.1 LED121.1 U4.6 | length 30.1
  Top Layer w0.381: LED119.1 70.307,21.412 v1(72.593,21.412) 76.378,21.412 76.759,21.031 76.835,21.387 LED121.1@83.82,21.387
  Bottom Layer w0.381: U4.6 69.291,34.214 72.403,31.102 72.403,28.79 72.39,28.777 72.39,21.107 72.593,21.311 v1(72.593,21.412)
LED3_U1: LED34.1 LED35.1 LED36.1 LED37.1 LED38.1 LED39.1 LED40.1 LED41.1 U1.7 | length 64.6
  Top Layer w0.381: LED34.1 LED35.1 22.504,69.85 ; 22.53,69.799 22.581,69.85 ; 22.53,69.85 22.581,69.85 ; LED41.1 LED40.1 LED39.1 LED38.1 LED37.1 LED36.1 26.746,71.044 v1(22.809,71.044) 22.809,70.079 22.581,69.85
  Bottom Layer w0.381: U1.7 21.641,80.62 22.835,79.426 22.835,70.104 22.809,70.129 v1(22.809,71.044)
LED3_U2: LED42.1 LED43.1 LED44.1 U2.7 | length 39.6
  Top Layer w0.381: LED42.1 v1(72.542,69.85) LED43.1 LED44.1
  Bottom Layer w0.381: U2.7 63.729,80.543 61.976,78.791 61.976,71.476 63.602,69.85 v1(72.542,69.85)
LED3_U4: LED_M1.1 LED_M2.1 LED_M3.1 LED_M4.1 U4.7 | length 282.2
  Top Layer w0.381: LED_M1.1 5.321,96.126 5.321,15.634 LED_M4.1 8.179,12.776 89.814,12.776 90.805,13.767 LED_M3.1 92.405,15.57 92.405,38.938 ; v1(71.501,35.941) 71.501,37.49 73.863,39.853 80.928,39.853 81.842,38.938 92.405,38.938 ; LED_M2.1 92.405,96.19 92.405,38.938
  Bottom Layer w0.381: U4.7 71.044,35.484 v1(71.501,35.941)
LED4_U1: LED45.1 LED46.1 LED47.1 LED48.1 LED49.1 LED50.1 LED51.1 LED52.1 U1.3 | length 63.7
  Top Layer w0.381: LED45.1 LED46.1 22.479,62.865 ; v1(22.403,68.072) 22.403,62.941 22.479,62.865 ; LED52.1 LED51.1 LED50.1 LED49.1 LED48.1 LED47.1 22.479,62.865
  Bottom Layer w0.381: U1.3 20.295,75.54 20.803,75.032 20.803,68.992 21.722,68.072 v1(22.403,68.072)
LED4_U2: LED53.1 LED54.1 LED55.1 U2.3 | length 37.5
  Top Layer w0.381: LED53.1 LED54.1 v1(79.629,62.865) LED55.1 ; v1(70.383,75.26) 71.349,74.295 v1(79.883,74.295)
  Bottom Layer w0.381: U2.3 68.555,75.26 v1(70.383,75.26) ; v1(79.629,62.865) 79.883,63.119 v1(79.883,74.295)
LED5_U1: LED56.1 LED57.1 LED58.1 LED59.1 LED60.1 LED61.1 LED62.1 LED63.1 U1.10 | length 124.9
  Top Layer w0.381: v1(6.706,76.073) 6.756,76.022 v1(6.756,70.079) ; LED56.1 v1(18.313,55.88) LED57.1 LED58.1 LED59.1 LED60.1 LED61.1 LED62.1 LED63.1
  Bottom Layer w0.381: v1(6.706,76.073) 6.655,76.124 6.655,84.176 8.458,85.979 16.942,85.979 18.491,84.43 U1.10 ; v1(6.756,70.079) 6.756,45.644 8.306,44.094 16.916,44.094 18.313,45.491 v1(18.313,55.88)
LED5_U2: LED64.1 LED65.1 LED66.1 U2.10 | length 59.3
  Top Layer w0.381: LED64.1 v1(72.517,55.88) LED65.1 LED66.1
  Bottom Layer w0.381: U2.10 67.869,84.836 63.17,84.836 61.087,82.753 61.087,58.064 63.271,55.88 v1(72.517,55.88)
LED6_U1: LED67.1 LED68.1 LED69.1 LED70.1 LED71.1 LED72.1 LED73.1 LED74.1 U1.5 | length 94.2
  Top Layer w0.381: v1(11.405,70.282) 11.506,70.383 v1(11.506,76.886) ; v1(13.97,46.99) LED67.1 LED68.1 LED69.1 LED70.1 LED71.1 LED72.1 LED73.1 LED74.1
  Bottom Layer w0.381: v1(11.405,70.282) 10.973,69.85 10.973,48.133 12.116,46.99 v1(13.97,46.99) ; v1(11.506,76.886) 11.506,78.791 12.395,79.68 16.485,79.68 18.085,78.08 U1.5
LED6_U2: LED75.1 LED76.1 LED77.1 U2.5 | length 52
  Top Layer w0.381: v1(66.091,48.87) 66.116,48.895 v1(66.116,78.003) ; LED75.1 v1@72.619,48.895 ; v1(72.619,49.022) v1@72.72,48.92 ; v1@72.72,48.895 LED76.1 LED77.1
  Bottom Layer w0.381: v1(66.091,48.87) 72.466,48.87 v1(72.619,49.022) ; v1(66.116,78.003) U2.5
LED7_U1: LED78.1 LED79.1 LED80.1 LED81.1 LED82.1 LED83.1 LED84.1 LED85.1 U1.8 | length 101.7
  Top Layer w0.381: v1(9.322,76.86) 9.322,43.561 10.973,41.91 LED78.1 LED79.1 LED80.1 LED81.1 LED82.1 LED83.1 LED84.1 LED85.1
  Bottom Layer w0.381: v1(9.322,76.86) 9.322,80.086 10.96,81.724 19.316,81.724 U1.8
LED7_U2: LED86.1 LED87.1 LED88.1 U2.8 | length 57.7
  Top Layer w0.381: v1(66.091,81.813) 67.818,80.086 67.818,43.942 LED86.1 LED87.1 LED88.1
  Bottom Layer w0.381: v1(66.091,81.813) U2.8
LEDA_U1: LED2.2 LED13.2 LED24.2 LED35.2 LED46.2 LED57.2 LED68.2 LED79.2 U1.14 | length 98
  Top Layer w0.381: v1(16.256,47.752) 16.256,45.796 17.342,44.71 LED79.2 ; v1@16.256,50.076 v1(16.256,50.267) 16.256,51.689 ; v1(16.256,54.864) 16.256,51.689 ; v1(16.256,57.15) 16.256,58.649 ; v1(16.256,61.468) 16.256,58.649 ; v1(16.256,64.084) 16.256,65.71 ; v1(16.256,68.58) 16.256,65.71 ; v1(16.256,71.12) 16.256,72.644 ; v1(16.256,75.692) 16.256,72.644 ; v1(16.256,78.232) 16.256,79.654 ; v1(16.256,89.408) 16.332,89.332 v1(16.332,84.912) 19.247,84.912 LED13.2 20.93,86.645 v1(20.93,88.875) ; v1(16.256,91.948) 16.256,91.973 17.888,93.605 LED2.2 ; v1(16.358,82.677) 16.256,82.575 16.256,79.654 ; LED68.2 16.262,51.695 16.256,51.689 ; LED57.2 16.287,58.68 16.256,58.649 ; LED46.2 16.301,65.665 16.256,65.71 ; LED35.2 16.262,72.65 16.256,72.644 ; LED24.2 16.275,79.635 16.256,79.654
  Bottom Layer w0.381: v1(16.256,47.752) v1(16.256,50.267) ; v1(16.256,54.864) v1(16.256,57.15) ; v1(16.256,61.468) v1(16.256,64.084) ; v1(16.256,68.58) v1(16.256,71.12) ; v1(16.256,75.692) v1(16.256,78.232) ; v1(16.256,89.408) v1(16.256,91.948) 16.408,92.1 v1@16.586,91.923 ; v1(16.332,84.912) 16.332,82.855 16.256,82.779 v1(16.358,82.677) ; v1(20.93,88.875) 22.708,88.875 25.883,85.7 U1.14
LEDA_U3: LED90.2 LED101.2 LED112.2 U3.14 | length 36.2
  Top Layer w0.381: v1(16.307,26.797) 16.307,24.486 17.037,23.755 LED112.2 ; v1(16.307,29.032) 16.307,30.709 ; v1(16.307,33.757) 16.307,30.709 ; v1(16.307,36.043) 16.307,37.109 16.922,37.725 LED90.2 23.26,40.03 v1(27.229,40.03) ; LED101.2 16.338,30.74 16.307,30.709
  Bottom Layer w0.381: v1(16.307,26.797) v1(16.307,29.032) ; v1(16.307,33.757) v1(16.307,36.043) ; v1(27.229,40.03) 27.305,40.107 U3.14
LEDB_U1: LED3.2 LED14.2 LED25.2 LED36.2 LED47.2 LED58.2 LED69.2 LED80.2 U1.16 | length 89.1
  Top Layer w0.381: v1(23.876,47.752) 23.876,45.644 24.81,44.71 LED80.2 ; v1(23.876,50.292) 23.876,51.664 ; v1(23.876,54.864) 23.876,51.664 ; v1(23.876,56.896) 23.876,58.725 ; v1(23.876,61.468) 23.876,58.725 ; v1(23.876,64.008) 24.079,64.211 23.978,64.313 v1(23.978,69.85) ; v1(23.876,75.514) 24.054,75.336 v1(24.054,72.65) LED36.2 ; v1(23.876,78.232) 23.876,78.517 24.994,79.635 ; v1(23.876,89.408) 25.044,88.24 25.044,86.62 ; v1(23.876,91.948) 23.876,92.354 25.127,93.605 LED3.2 ; 24.206,65.665 LED47.2 ; v1(24.994,82.499) 24.994,79.635 ; v1(25.044,84.938) 25.044,86.62 ; LED69.2 23.907,51.695 23.876,51.664 ; LED58.2 23.921,58.68 23.876,58.725 ; LED25.2 24.994,79.635 ; v1(32.36,85.065) 32.36,85.776 31.515,86.62 LED14.2 25.044,86.62
  Bottom Layer w0.381: v1(23.876,47.752) 23.724,47.752 23.698,47.777 23.876,47.955 v1(23.876,50.292) ; v1(23.876,54.864) v1(23.876,56.896) ; v1(23.876,61.468) v1(23.876,64.008) ; v1(23.876,75.514) v1(23.876,78.232) ; v1(23.876,89.408) v1(23.876,91.948) ; v1(23.978,69.85) 24.054,69.926 v1(24.054,72.65) ; v1(24.994,82.499) 25.044,82.55 v1(25.044,84.938) ; U1.16 31.648,83.16 32.36,83.871 v1(32.36,85.065)
LEDB_U3: LED91.2 LED102.2 LED113.2 U3.16 | length 31.5
  Top Layer w0.381: v1(23.876,26.924) 23.876,24.892 25.013,23.755 LED113.2 ; v1(23.876,28.956) 23.876,30.785 ; v1(23.876,33.528) 23.876,30.785 ; v1(23.876,36.068) 23.876,37.084 24.517,37.725 LED91.2 ; LED102.2 23.921,30.74 23.876,30.785
  Bottom Layer w0.381: v1(23.876,26.924) v1(23.876,28.956) ; v1(23.876,33.528) v1(23.876,36.068) 23.876,37.084 24.359,37.567 U3.16
LEDC_U1: LED4.2 LED15.2 LED26.2 LED37.2 LED48.2 LED59.2 LED70.2 LED81.2 U1.20 | length 92.7
  Top Layer w0.381: v1(30.759,78.08) 30.759,78.232 32.461,79.934 34.626,79.934 LED26.2 35.224,79.934 35.376,79.781 v1(39.599,79.781) ; LED81.2 38.766,44.71 39.802,45.745 39.802,47.65 v1(39.599,47.854) ; LED70.2 39.503,51.695 v1(39.624,51.816) ; LED59.2 35.173,58.928 35.275,58.826 v1(39.624,58.826) ; LED48.2 39.542,65.665 v1(39.599,65.608) ; LED37.2 39.694,72.65 v1(39.612,72.568) ; LED15.2 35.185,86.36 35.388,86.563 v1(39.599,86.563) ; LED4.2 37.713,93.605 v1(39.268,92.05)
  Bottom Layer w0.381: U1.20 v1(30.759,78.08) ; v1(39.268,92.05) 39.599,91.719 v1(39.599,86.563) v1(39.599,79.781) 39.599,72.581 v1(39.612,72.568) 39.612,65.622 v1(39.599,65.608) 39.599,64.541 39.624,64.516 v1(39.624,58.826) v1(39.624,51.816) 39.624,47.879 v1(39.599,47.854)
LEDC_U3: LED92.2 LED103.2 LED114.2 U3.20 | length 35.5
  Top Layer w0.381: v1(30.988,32.41) 31.013,32.436 31.013,31.547 31.82,30.74 LED103.2 39.948,30.74 39.929,30.721 v1(39.929,30.582) ; LED114.2 39.122,23.755 v1(39.954,24.587) ; LED92.2 38.856,37.725 40.03,36.551 v1(40.03,36.678)
  Bottom Layer w0.381: U3.20 29.134,32.41 v1(30.988,32.41) ; v1(39.929,30.582) 39.929,24.613 v1(39.954,24.587) ; v1@39.954,30.582 40.03,30.658 v1(40.03,36.678)
LEDD_U1: LED5.2 LED16.2 LED27.2 LED38.2 LED49.2 LED60.2 LED71.2 LED82.2 U1.23 | length 88
  Top Layer w0.381: v1(33.198,74.27) 40.29,74.27 LED38.2 45.206,72.65 v1(45.212,72.644) ; LED82.2 44.202,44.71 45.212,45.72 v1(45.212,47.752) ; LED71.2 45.091,51.695 v1(45.212,51.816) ; LED60.2 44.964,58.68 v1(45.212,58.928) ; LED49.2 45.079,65.665 v1(45.212,65.532) ; LED27.2 45.091,79.635 v1(45.212,79.756) ; LED16.2 44.952,86.62 v1(45.212,86.36) ; LED5.2 44.063,93.605 45.212,92.456 v1(45.212,91.948)
  Bottom Layer w0.381: U1.23 v1(33.198,74.27) ; v1(45.212,47.752) v1(45.212,51.816) v1(45.212,58.928) v1(45.212,65.532) v1(45.212,72.644) v1(45.212,79.756) v1(45.212,86.36) v1(45.212,91.948)
LEDD_U3: LED93.2 LED104.2 LED115.2 U3.23 | length 45.7
  Top Layer w0.381: v1(26.416,25.959) 41.326,25.959 41.91,25.375 LED115.2 44.583,23.755 45.212,24.384 45.085,24.511 v1(45.085,24.765) ; LED104.2 44.964,30.74 v1(45.212,30.988) ; LED93.2 44.571,37.725 45.212,37.084 v1(45.212,36.068)
  Bottom Layer w0.381: v1(26.416,25.959) 26.416,28.042 27.051,28.677 U3.23 ; v1(45.085,24.765) 45.085,30.861 v1(45.212,30.988) v1(45.212,36.068)
LEDD_U4: LED_M1.2 U4.23 | length 169.6
  Top Layer w0.381: LED_M1.2 7.944,101.549 84.912,101.549 87.325,99.136 87.325,47.168 v1(86.614,46.457) ; v1(72.796,33.757) 72.796,30.429 73.99,29.235 v1(75.26,29.235)
  Bottom Layer w0.381: v1(72.796,33.757) 72.796,36.754 71.095,38.456 71.095,41.123 75.311,45.339 85.496,45.339 v1(86.614,46.457) ; v1(75.26,29.235) 77.953,29.235 U4.23
LEDDP_U1: LED1.2 LED12.2 LED23.2 LED34.2 LED45.2 LED56.2 LED67.2 LED78.2 U1.22 | length 82.3
  Top Layer w0.381: LED78.2 13.558,44.71 12.731,45.536 12.731,51.72 ; LED67.2 13.945,51.72 12.731,51.72 ; LED56.2 13.868,58.578 12.731,58.578 ; LED34.2 12.757,72.65 12.731,72.675 ; LED23.2 13.945,79.61 12.731,79.61 ; LED12.2 12.757,86.62 12.731,86.645 ; LED1.2 13.468,93.605 12.731,92.868 12.731,86.645 ; v1(14.021,67.208) 14.021,67.361 13.97,67.412 LED45.2 12.757,65.665 12.731,65.69 ; 12.731,51.72 12.731,58.578 ; 12.731,58.578 12.731,65.69 ; 12.731,65.69 12.731,72.675 ; 12.731,72.675 12.731,79.61 ; 12.731,79.61 12.731,86.645
  Bottom Layer w0.381: v1(14.021,67.208) 14.122,67.107 25.959,67.107 26.873,68.021 26.873,74.676 27.737,75.54 U1.22
LEDDP_U3: LED89.2 LED100.2 LED111.2 U3.22 | length 41.6
  Top Layer w0.381: 10.947,30.709 12.649,30.709 12.681,30.74 LED100.2 ; v1(13.97,25.476) LED111.2 12.592,23.755 10.719,25.629 10.719,35.941 12.503,37.725 LED89.2
  Bottom Layer w0.381: v1(13.97,25.476) 24.181,25.476 25.07,26.365 25.07,29.108 25.908,29.947 U3.22
LEDE_U1: LED6.2 LED17.2 LED28.2 LED39.2 LED50.2 LED61.2 LED72.2 LED83.2 U1.21 | length 107.1
  Top Layer w0.381: v1(25.73,68.732) 26.187,68.275 47.447,68.275 48.895,66.827 LED50.2 51.683,65.665 v1(51.816,65.532) ; LED83.2 50.806,44.71 51.816,45.72 v1(51.816,47.752) ; LED72.2 51.695,51.695 v1(51.816,51.816) ; LED61.2 51.568,58.68 v1(51.816,58.928) ; LED39.2 51.81,72.65 v1(51.816,72.644) ; LED28.2 51.695,79.635 v1(51.816,79.756) ; LED17.2 51.556,86.62 v1(51.816,86.36) ; LED6.2 50.667,93.605 51.816,92.456 v1(51.816,91.948)
  Bottom Layer w0.381: v1(25.73,68.732) 25.73,75.59 26.949,76.81 U1.21 ; v1(51.816,47.752) v1(51.816,51.816) v1(51.816,58.928) v1(51.816,65.532) v1(51.816,72.644) v1(51.816,79.756) v1(51.816,86.36) v1(51.816,91.948)
LEDE_U2: LED9.2 LED20.2 LED31.2 LED42.2 LED53.2 LED64.2 LED75.2 LED86.2 U2.21 | length 68.3
  Top Layer w0.381: LED86.2 69.082,44.71 68.58,45.212 68.58,51.74 ; LED75.2 68.625,51.695 68.58,51.74 ; LED64.2 68.599,58.68 68.58,58.699 ; LED53.2 68.599,65.665 68.58,65.684 ; LED31.2 68.65,79.635 68.58,79.705 ; LED20.2 68.676,86.62 68.58,86.716 ; LED9.2 69.221,93.605 68.58,92.964 68.58,86.716 ; v1(72.034,72.593) 69.907,72.593 LED42.2 68.676,72.65 68.58,72.746 ; 68.58,51.74 68.58,58.699 ; 68.58,58.699 68.58,65.684 ; 68.58,65.684 68.58,72.746 ; 68.58,72.746 68.58,79.705 ; 68.58,79.705 68.58,86.716
  Bottom Layer w0.381: v1(72.034,72.593) 72.085,72.593 76.225,76.733 U2.21
LEDE_U3: LED94.2 LED105.2 LED116.2 U3.21 | length 47.1
  Top Layer w0.381: v1(30.759,29.591) v1(32.868,29.591) ; v1(32.868,27) 33.198,26.67 45.98,26.67 LED116.2 51.187,23.755 51.816,24.384 v1(51.816,26.416) ; LED105.2 51.568,30.74 v1(51.816,30.988) ; LED94.2 51.175,37.725 51.816,37.084 v1(51.816,36.068)
  Bottom Layer w0.381: U3.21 30.023,31.217 30.759,30.48 v1(30.759,29.591) ; v1(32.868,27) v1(32.868,29.591) ; v1(51.816,26.416) v1(51.816,30.988) v1(51.816,36.068)
LEDE_U4: LED97.2 LED108.2 LED119.2 LED_M2.2 U4.21 | length 122.4
  Top Layer w0.381: LED108.2 65.71,30.74 ; v1(72.314,40.513) 72.314,40.189 LED97.2 66.833,37.725 65.71,36.601 65.71,30.74 ; v1(79.731,25.679) 74.6,25.679 72.675,23.755 LED119.2 66.771,23.755 65.71,24.816 65.71,30.74 ; v1(86.309,44.12) 88.798,44.12 89.56,44.882 89.56,99.345 LED_M2.2
  Bottom Layer w0.381: v1(72.314,40.513) 72.314,40.818 75.616,44.12 v1(86.309,44.12) ; U4.21 79.172,31.674 79.731,31.115 v1(79.731,25.679)
LEDF_U1: LED7.2 LED18.2 LED29.2 LED40.2 LED51.2 LED62.2 LED73.2 LED84.2 U1.15 | length 100.3
  Top Layer w0.381: v1(37.236,81.585) 53.067,81.585 55.016,79.635 LED29.2 58.299,79.635 v1(58.42,79.756) ; LED84.2 57.41,44.71 58.42,45.72 v1(58.42,47.752) ; LED73.2 58.299,51.695 v1(58.42,51.816) ; LED62.2 58.172,58.68 v1(58.42,58.928) ; LED51.2 58.287,65.665 v1(58.42,65.532) ; LED40.2 58.414,72.65 v1(58.42,72.644) ; LED18.2 56.14,86.36 v1(58.42,86.36) ; LED7.2 57.779,93.605 58.42,92.964 v1(58.42,91.948)
  Bottom Layer w0.381: U1.15 29.87,84.43 31.471,86.03 35.306,86.03 37.236,84.099 v1(37.236,81.585) ; v1(58.42,47.752) v1(58.42,51.816) v1(58.42,58.928) v1(58.42,65.532) v1(58.42,72.644) v1(58.42,79.756) v1(58.42,86.36) v1(58.42,91.948)
LEDF_U2: LED10.2 LED21.2 LED32.2 LED43.2 LED54.2 LED65.2 LED76.2 LED87.2 U2.15 | length 87.2
  Top Layer w0.381: LED87.2 80.27,44.71 81.28,45.72 v1(81.28,47.752) ; LED76.2 81.21,51.695 81.28,51.765 ; LED65.2 81.235,58.68 81.28,58.725 ; LED54.2 81.235,65.665 81.28,65.71 ; LED43.2 81.261,72.65 81.28,72.669 ; LED32.2 81.274,79.635 81.28,79.629 ; LED21.2 81.261,86.62 81.28,86.639 ; LED10.2 80.639,93.605 81.28,92.964 v1(81.28,91.948) ; v1(81.28,50.292) 81.28,51.765 ; v1(81.28,54.864) 81.28,51.765 ; v1(81.28,56.896) 81.28,58.725 ; v1(81.28,61.468) 81.28,58.725 ; v1(81.28,64.008) 81.28,65.71 ; v1(81.28,68.58) 81.28,65.71 ; v1(81.28,71.12) 81.28,72.669 ; v1(81.28,75.692) 81.28,72.669 ; v1(81.28,77.978) 81.28,79.578 81.305,79.604 81.28,79.629 ; v1(81.28,82.804) 81.28,79.629 ; v1(81.28,84.836) 81.28,86.639 ; v1(81.28,89.408) 81.28,86.639
  Bottom Layer w0.381: U2.15 78.461,84.353 78.943,84.836 v1(81.28,84.836) v1(81.28,82.804) ; v1(81.28,47.752) v1(81.28,50.292) ; v1(81.28,54.864) v1(81.28,56.896) ; v1(81.28,61.468) v1(81.28,64.008) ; v1(81.28,68.58) v1(81.28,71.12) ; v1(81.28,75.692) 81.305,75.717 81.28,75.743 v1(81.28,77.978) ; v1(81.28,89.408) v1(81.28,91.948)
LEDF_U3: LED95.2 LED106.2 LED117.2 U3.15 | length 47.5
  Top Layer w0.381: v1(32.715,38.76) 32.944,38.989 54.616,38.989 LED95.2 58.008,37.725 58.42,37.313 v1(58.42,36.068) ; LED117.2 57.283,23.755 58.42,24.892 v1(58.42,26.416) ; LED106.2@56.197,30.734 58.166,30.734 v1(58.42,30.988)
  Bottom Layer w0.381: U3.15@29.515,38.76 v1(32.715,38.76) ; v1(58.42,26.416) v1(58.42,30.988) v1(58.42,36.068)
LEDF_U4: LED98.2 LED109.2 LED120.2 LED_M3.2 U4.15 | length 51
  Top Layer w0.381: LED120.2 80.143,23.755 81.28,24.892 v1(81.28,26.924) ; LED109.2 81.261,30.74 81.28,30.759 ; LED98.2 80.639,37.725 81.89,36.474 v1(81.89,36.043) ; v1(81.28,28.956) 81.28,30.759 ; v1(81.839,33.299) 81.28,32.741 81.28,30.759 ; v1(86.766,21.692) 86.766,17.932 87.929,16.77 LED_M3.2
  Bottom Layer w0.381: U4.15 80.416,39.294 81.89,37.821 v1(81.89,36.043) 81.89,33.35 v1(81.839,33.299) ; v1(81.28,28.956) v1(81.28,26.924) 81.432,26.772 81.432,23.19 82.931,21.692 v1(86.766,21.692)
LEDG_U1: LED8.2 LED19.2 LED30.2 LED41.2 LED52.2 LED63.2 LED74.2 LED85.2 U1.17 | length 94.6
  Top Layer w0.381: v1(30.937,81.864) 31.725,82.652 59.848,82.652 LED30.2 64.256,79.635 64.262,79.629 ; LED85.2 63.189,44.71 64.237,45.757 64.237,51.695 ; LED74.2 64.237,51.695 ; LED63.2 64.237,58.68 ; LED52.2 64.237,65.665 ; LED41.2 64.256,72.65 64.237,65.665 ; LED19.2 64.262,86.569 ; LED8.2 63.875,93.605 64.262,93.218 64.262,86.569 ; 64.261,72.65 64.262,79.629 ; 64.237,51.695 64.237,58.68 ; 64.237,58.68 64.237,65.665 ; 64.262,79.629 64.262,86.569
  Bottom Layer w0.381: U1.17 29.007,81.864 v1(30.937,81.864)
LEDG_U2: LED11.2 LED22.2 LED33.2 LED44.2 LED55.2 LED66.2 LED77.2 LED88.2 U2.17 | length 68.5
  Top Layer w0.381: LED88.2 84.334,44.71 85.344,45.72 85.344,51.664 ; LED77.2 85.313,51.695 85.344,51.664 ; LED66.2 85.287,58.68 85.344,58.623 ; LED55.2 85.172,65.665 85.344,65.837 ; LED44.2 85.287,72.65 85.344,72.593 ; LED22.2 85.274,86.62 85.344,86.69 ; LED11.2 84.703,93.605 85.344,92.964 85.344,86.69 ; v1(83.896,81.813) 83.82,81.737 LED33.2 85.325,79.635 85.344,79.654 ; 85.344,51.664 85.344,58.623 ; 85.344,58.623 85.344,65.837 ; 85.344,65.837 85.344,72.593 ; 85.344,72.593 85.344,79.654 ; 85.344,79.654 85.344,86.69
  Bottom Layer w0.381: U2.17 v1(83.896,81.813)
LEDG_U3: LED96.2 LED107.2 LED118.2 U3.17 | length 54.8
  Top Layer w0.381: v1(31.267,36.398) 31.267,39.167 31.883,39.782 60.808,39.782 LED96.2 63.875,37.725 64.262,37.338 64.262,30.759 ; LED118.2 64.262,25.152 64.262,30.759 ; LED107.2 64.243,30.74 64.262,30.759
  Bottom Layer w0.381: U3.17 31.166,36.297 v1(31.267,36.398)
LEDG_U4: LED99.2 LED110.2 LED121.2 LED_M4.2 U4.17 | length 118.9
  Top Layer w0.381: LED_M4.2 10.141,13.614 72.542,13.614 78.232,19.304 84.709,19.304 85.344,19.939 85.344,23.8 ; v1(74.854,36.703) 74.854,38.125 75.844,39.116 80.467,39.116 81.858,37.725 LED99.2 84.703,37.725 85.344,37.084 85.344,30.785 ; LED121.2 85.299,23.755 85.344,23.8 ; LED110.2 85.299,30.74 85.344,30.785 ; 85.344,23.8 85.344,30.785
  Bottom Layer w0.381: v1(74.854,36.703) 78.004,36.703 U4.17
LOAD: P1.4 U1.12 U2.12 U3.12 U4.12 | length 224
  Top Layer w0.381: v1(11.659,86.944) 9.246,86.944 8.255,85.954 8.255,40.31 ; v1(13.411,40.31) 8.255,40.31 ; P1.4@51.486,15.164 P1.4@51.486,16.383 ; v1(64.973,43.688) v1@64.897,43.764 ; v1(65.659,86.944) 64.897,86.182 v1@64.897,43.764 ; 8.255,40.31 8.255,20.828 9.881,19.202 48.666,19.202 P1.4@51.486,16.383 ; P1.4@51.486,16.383 51.486,16.561 53.594,18.669 63.754,18.669 64.897,19.812 v1@64.897,43.764
  Bottom Layer w0.381: v1(11.659,86.944) 11.684,86.97 U1.12 ; v1(13.411,40.31) 14.351,40.31 15.418,41.377 U3.12 ; v1@65.341,43.447 66.954,41.834 U4.12 ; v1(65.659,86.944) 65.659,86.919 65.634,86.893 U2.12
NetR1_1: R1.1 U1.18 | length 4
  Bottom Layer w0.381: U1.18 32.385,80.62 R1.1@32.817,81.051
NetR2_1: R2.1 U2.18 | length 2.5
  Bottom Layer w0.381: U2.18 80.188,80.543 R2.1
NetR3_1: R3.1 U3.18 | length 4.5
  Bottom Layer w0.381: U3.18 31.877,35.027 R3.1
NetR4_1: R4.1 U4.18 | length 2
  Bottom Layer w0.381: U4.18 79.731,35.484 R4.1
VCC: C1.2 C2.2 C3.2 C4.2 C5.2 C6.2 C7.2 C8.2 P1.2 R1.2 R2.2 R3.2 R4.2 U1.19 U2.19 U3.19 U4.19 | length 210.5
  Bottom Layer w0.762: U1.19 36.271,79.35 ; U3.19 33.067,33.695 33.088,33.695 36.271,33.646 ; R1.2@35.662,80.95 36.271,80.34 36.271,79.35 ; U2.19 82.702,79.273 ; U4.19 78.74,34.214 81.178,31.775 88.087,31.775 ; R2.2 82.601,79.375 82.702,79.273 ; 36.271,33.646 C7.2 36.271,79.35 ; 36.271,33.646 36.271,20.117 37.135,19.253 43.663,19.253 46.406,16.51 47.727,17.831 80.035,17.831 81.356,19.152 86.131,19.152 88.087,21.107 88.087,31.775 ; 82.702,79.273 86.03,79.273 88.087,77.216 88.087,31.775
pads on no net: U2.14 U2.16 U2.20 U2.22 U2.23 U3.3 U3.5 U3.7 U3.8 U3.10 U4.3 U4.5 U4.8 U4.10 U4.14 U4.16 U4.20 U4.22 U4.24

## Polygon pours and split planes (outlines as drawn)
GND on Bottom Layer "GND_L02_P026" (solid, remove dead copper, pour order 26): -4.724,108.458 99.39,108.458 98.171,107.239 98.171,5.334 -2.057,5.334
GND on Top Layer "GND_L01_P028" (solid, remove dead copper, pour order 28): -0.356,110.134 -0.102,110.388 101.295,110.388 101.295,3.861 100.584,3.15 98.882,4.851 0.61,4.851

## Keep-outs
Keep-Out Layer:
  the board outline again, w0.305

## Silkscreen, mask and mechanical layers (free items; w line width, h text height)
Top Overlay:
  text "LED BOARD V2" at 38.024,97.942 h2.03
  text "Din" at 47.752,18.288 h0.76
  text "Load" at 50.241,18.212 h0.76
  text "Clk" at 53.772,18.212 h0.76
  text "-" at 43.18,17.983 h1.52
  text "+" at 45.771,17.958 h1.52
  text "WORD" at 29.159,16.231 h1.65
  text "PxF team" at 66.243,14.783 h1.27
  text "CLOCK" at 28.473,13.386 h1.65
Bottom Overlay:
  text "Din" at 49.555,18.263 h0.76
  text "Clk" at 55.321,18.263 h0.76
  text "Load" at 52.959,18.212 h0.76
  text "-" at 44.145,17.983 h1.52
  text "+" at 46.863,17.958 h1.52